# EAGLE board df40-70-spacer-mech (EAGLE 6.5.0)

Size 6 x 16.25 mm. Coordinates in mm from the lower left corner, seen from the top.
Outline: 0,15.54 0,0.71 arc90 0.71,0 5.1,0 arc90 6,0.9 6,15.54 arc90 5.29,16.25 0.71,16.25 arc90 0,15.54
Copper layers (1*16): Top 0.0356mm / dielectric 1.5011mm / Bottom 0.0356mm
Design rules "ohs-park-2-layer": minimum track width 6mil, minimum drill 13mil, track to track 6mil, track to pad 6mil, pad to pad 6mil, via to via 6mil, smd to smd 6mil, copper to edge 15mil, drill to drill 6mil, minimum pad ring 7mil, minimum via ring 7mil, stop-mask expansion 4mil, vias tented up to drill 100mil, thermal gap 10mil

## Footprints (pad centres in the part's own frame; a part is rotated, then mirrored left to right if it is on the bottom)
DF40-70REC = smd 0.2 x 1.14: 1 -6.8,1.17; 2 -6.4,1.17; 3 -6,1.17; 4 -5.6,1.17; 5 -5.2,1.17; 6 -4.8,1.17; 7 -4.4,1.17; 8 -4,1.17; 9 -3.6,1.17; 10 -3.2,1.17; 11 -2.8,1.17; 12 -2.4,1.17; 13 -2,1.17; 14 -1.6,1.17; 15 -1.2,1.17; 16 -0.8,1.17; 17 -0.4,1.17; 18 0,1.17; 19 0.4,1.17; 20 0.8,1.17; 21 1.2,1.17; 22 1.6,1.17; 23 2,1.17; 24 2.4,1.17; 25 2.8,1.17; 26 3.2,1.17; 27 3.6,1.17; 28 4,1.17; 29 4.4,1.17; 30 4.8,1.17; 31 5.2,1.17; 32 5.6,1.17; 33 6,1.17; 34 6.4,1.17; 35 6.8,1.17; 36 6.8,-1.17; 37 6.4,-1.17; 38 6,-1.17; 39 5.6,-1.17; 40 5.2,-1.17; 41 4.8,-1.17; 42 4.4,-1.17; 43 4,-1.17; 44 3.6,-1.17; 45 3.2,-1.17; 46 2.8,-1.17; 47 2.4,-1.17; 48 2,-1.17; 49 1.6,-1.17; 50 1.2,-1.17; 51 0.8,-1.17; 52 0.4,-1.17; 53 0,-1.17; 54 -0.4,-1.17; 55 -0.8,-1.17; 56 -1.2,-1.17; 57 -1.6,-1.17; 58 -2,-1.17; 59 -2.4,-1.17; 60 -2.8,-1.17; 61 -3.2,-1.17; 62 -3.6,-1.17; 63 -4,-1.17; 64 -4.4,-1.17; 65 -4.8,-1.17; 66 -5.2,-1.17; 67 -5.6,-1.17; 68 -6,-1.17; 69 -6.4,-1.17; 70 -6.8,-1.17
DF40-70HEAD = smd 0.23 x 0.66: 1 -6.8,-1.685; 2 -6.4,-1.685; 3 -6,-1.685; 4 -5.6,-1.685; 5 -5.2,-1.685; 6 -4.8,-1.685; 7 -4.4,-1.685; 8 -4,-1.685; 9 -3.6,-1.685; 10 -3.2,-1.685; 11 -2.8,-1.685; 12 -2.4,-1.685; 13 -2,-1.685; 14 -1.6,-1.685; 15 -1.2,-1.685; 16 -0.8,-1.685; 17 -0.4,-1.685; 18 0,-1.685; 19 0.4,-1.685; 20 0.8,-1.685; 21 1.2,-1.685; 22 1.6,-1.685; 23 2,-1.685; 24 2.4,-1.685; 25 2.8,-1.685; 26 3.2,-1.685; 27 3.6,-1.685; 28 4,-1.685; 29 4.4,-1.685; 30 4.8,-1.685; 31 5.2,-1.685; 32 5.6,-1.685; 33 6,-1.685; 34 6.4,-1.685; 35 6.8,-1.685; 36 6.8,1.685; 37 6.4,1.685; 38 6,1.685; 39 5.6,1.685; 40 5.2,1.685; 41 4.8,1.685; 42 4.4,1.685; 43 4,1.685; 44 3.6,1.685; 45 3.2,1.685; 46 2.8,1.685; 47 2.4,1.685; 48 2,1.685; 49 1.6,1.685; 50 1.2,1.685; 51 0.8,1.685; 52 0.4,1.685; 53 0,1.685; 54 -0.4,1.685; 55 -0.8,1.685; 56 -1.2,1.685; 57 -1.6,1.685; 58 -2,1.685; 59 -2.4,1.685; 60 -2.8,1.685; 61 -3.2,1.685; 62 -3.6,1.685; 63 -4,1.685; 64 -4.4,1.685; 65 -4.8,1.685; 66 -5.2,1.685; 67 -5.6,1.685; 68 -6,1.685; 69 -6.4,1.685; 70 -6.8,1.685 | smd 0.35 x 0.66: M1 -7.275,-1.685; M2 7.275,-1.685; M3 7.275,1.685; M4 -7.275,1.685

## Placement (x,y rotation side)
ATHRU_A_BOT  DF40REC  [DF40-70REC]  3.5,8 270 bottom
ATHRU_A_TOP  DF40HEAD  [DF40-70HEAD]  3.5,8 270 top

## Library data of the parts
ATHRU_A_BOT ATHRU_A_TOP = jonnew

## Text on the board
tPlace: JPN. MWL@MIT. HDR
bPlace: RCP